# Altium PCB DISPLAY_OLED.PcbDoc
Units mm, origin at the board's own origin, x right, y up, seen from the top; angles counter-clockwise.
Board outline 80 x 30 mm, 2 copper layers (Top Layer, Bottom Layer), stack 1.671 mm thick; 3 components, 0 nets, 22 pads, 0 vias.
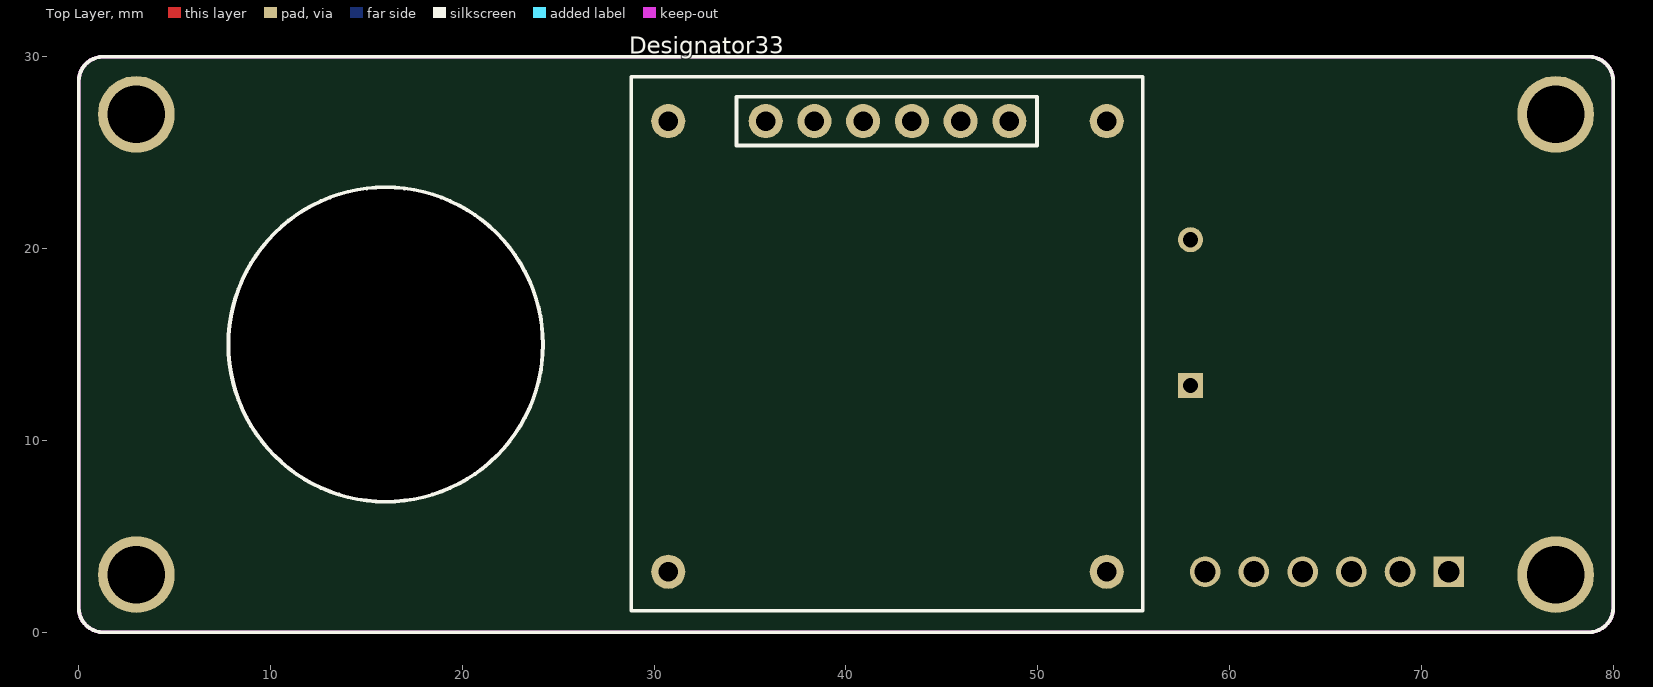
[diagram p0: Top Layer view]
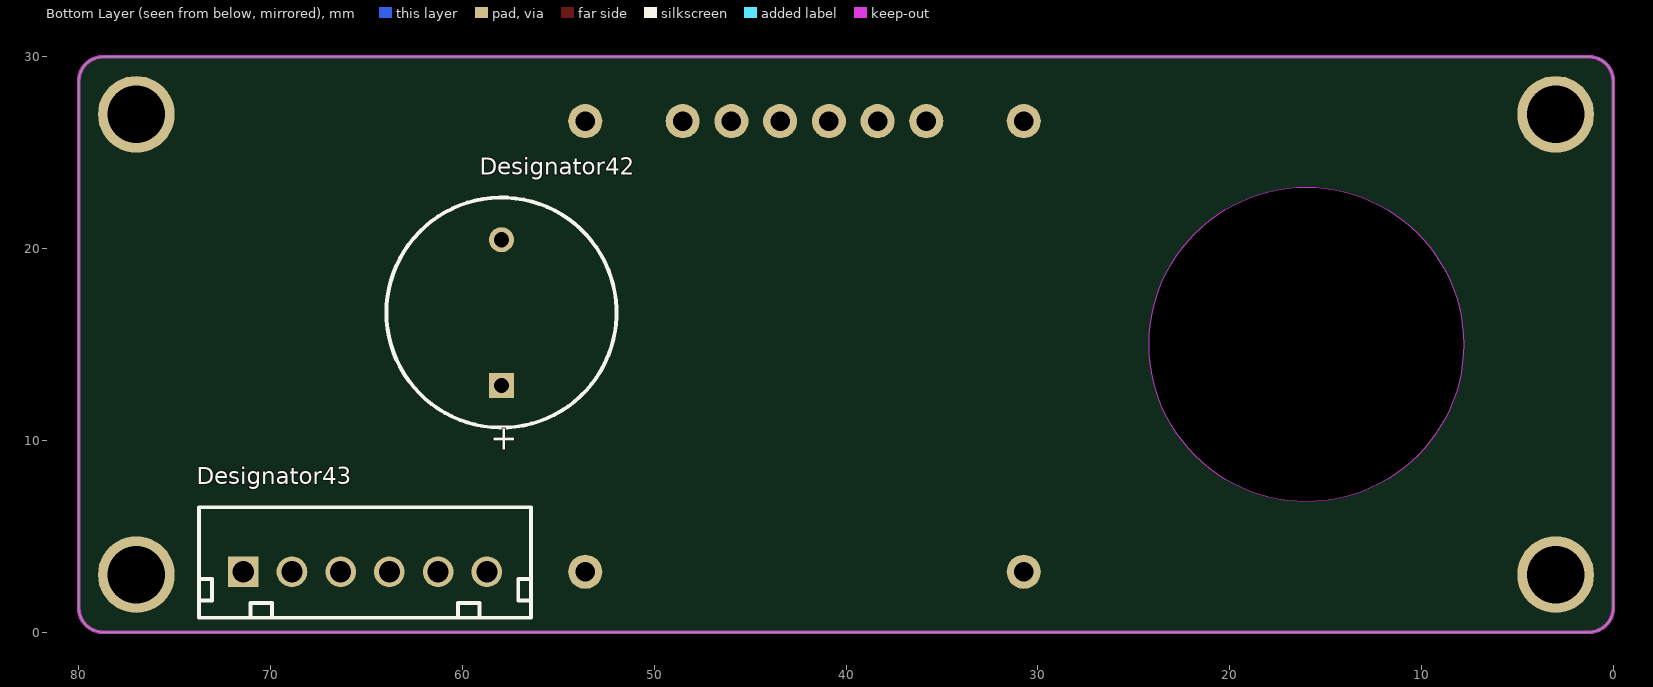
[diagram p1: Bottom Layer view, seen from below]

## Layer stack, top to bottom
Top Solder: solder mask 0.0102, Solder Resist, Dk 3.5
Top Layer: signal copper 0.0356
Dielectric 1: dielectric 1.6, FR-4, Dk 4.8
Bottom Layer: signal copper 0.0356
Bottom Solder: solder mask 0.0102, Solder Resist, Dk 3.5

## Board outline
0,1.27 ccw(c1.27,1.27) 1.27,0 78.73,0 ccw(c78.73,1.27) 80,1.27 80,28.73 ccw(c78.73,28.73) 78.73,30 1.27,30 ccw(c1.27,28.73) 0,28.73
cut-out: 7.8,15 ccw(c16,15) 16,6.8 ccw(c16,15) 24.2,15 ccw(c16,15) 16,23.2 ccw(c16,15)

## Design rules (kind name [scope] priority, off if disabled: settings)
Clearance [All] p1: gap=0.254 ignorepadtopadclearanceinfootprint=FALSE except(0: Arc-Hole Track-Hole SMDPad-Hole THPad-Hole Via-Hole Fill-Hole Poly-Hole Region-Hole Text-Hole)
PolygonConnect [All] p1: connectstyle=Relief reliefconductorwidth=0.254 reliefentries=4 polygonreliefangle="90 Angle" airgapwidth=0.254
RoutingVias [All] p1: holewidth=0.711 width=1.27 viastyle="Through Hole" minholewidth=0.711 minwidth=1.27 maxholewidth=0.711 maxwidth=1.27
SolderMaskExpansion [All] p1: expansion=0.102 istentingtop=FALSE
Width [All] p1: maxlimit=0.254 minlimit=0.254 preferedwidth=0.254
30 further rules are at their usual default settings.

## Components (designator, comment, footprint, x,y, rotation, side; value= is the part's Value field where it differs from the comment)
Designator33 "Comment" "OLED 0.96\" SSD1306" 40.894,16.485 r0 top
Designator42 "Comment" "BUZZER  5V 12x9.5mm" 57.963,16.662 r90 bottom
Designator43 "Comment" XH2.54-6P 65.075,3.15 r180 bottom

## Footprints (in the part's own frame and the unit in brackets; to place one, negate y for a bottom-side part, rotate by r counter-clockwise, add the part's x,y. Pads: shape width x height; smd on the part's side, far side on the other; paste and mask are expansions set on the pad)
"BUZZER  5V 12x9.5mm" [mm]
  rect 1.308x1.308 hole 0.8: 1(-3.8,0)
  round 1.308 hole 0.8: 2(3.8,0)
  silkscreen extent -6,-6 6,6, body extent -6,-6 6,6, height 9.6
"OLED 0.96\" SSD1306" [mil]
  round 70 hole 40: 0(-400,-525) 0(-400,400) 0(500,-525) 0(500,400) 1(-200,400) 2(-100,400) 3(0,400) 4(100,400) 5(200,400) 6(300,400)
  silkscreen extent -476,-605 574,491, body extent -477,-606 575,491, height 137
XH2.54-6P [mm]
  rect 1.6x1.6 hole 1.1: 1(-6.35,0)
  round 1.6 hole 1.1: 2(-3.81,0) 3(-1.27,0) 4(1.27,0) 5(3.81,0) 6(6.35,0)
  silkscreen extent -8.66,-2.4 8.66,3.36, body extent -8.69,-2.49 8.69,3.35, height 7.21

## Free pads (board coordinates)
  round 4 hole 3 unplated: 0(3,3) 0(3,27) 0(77,3) 0(77,27)

## Nets (pads, with @x,y where several pads share a name; then routed paths per layer and width w, separated by ;. In a path a pad name is that pad's centre, name@x,y a point inside that pad or via, vN(x,y) a via of type N, cw(c..) or ccw(c..) an arc to the next point about the centre after c; other vN are vias at no path point)
pads on no net: Designator33.0 Designator33.1 Designator33.2 Designator33.3 Designator33.4 Designator33.5 Designator33.6 Designator42.1 Designator42.2 Designator43.1 Designator43.2 Designator43.3 Designator43.4 Designator43.5 Designator43.6

## Keep-outs
Keep-Out Layer:
  the board outline again, w0.2

## Silkscreen, mask and mechanical layers (free items; w line width, h text height)
Top Overlay:
  circle w0.2: c16,15 r8.2
  lines w0.2: 0,1.27 ccw(c1.27,1.27) 1.27,0 78.73,0 ccw(c78.73,1.27) 80,1.27 80,28.73 ccw(c78.73,28.73) 78.73,30 1.27,30 ccw(c1.27,28.73) 0,28.73 0,1.27

## Text inside footprints (layer, text, board x,y; h text height)
Designator42: Bottom Overlay "+" at 57.302,9.335 h1.27 r270